# EAGLE board boat1 (EAGLE 6.4)
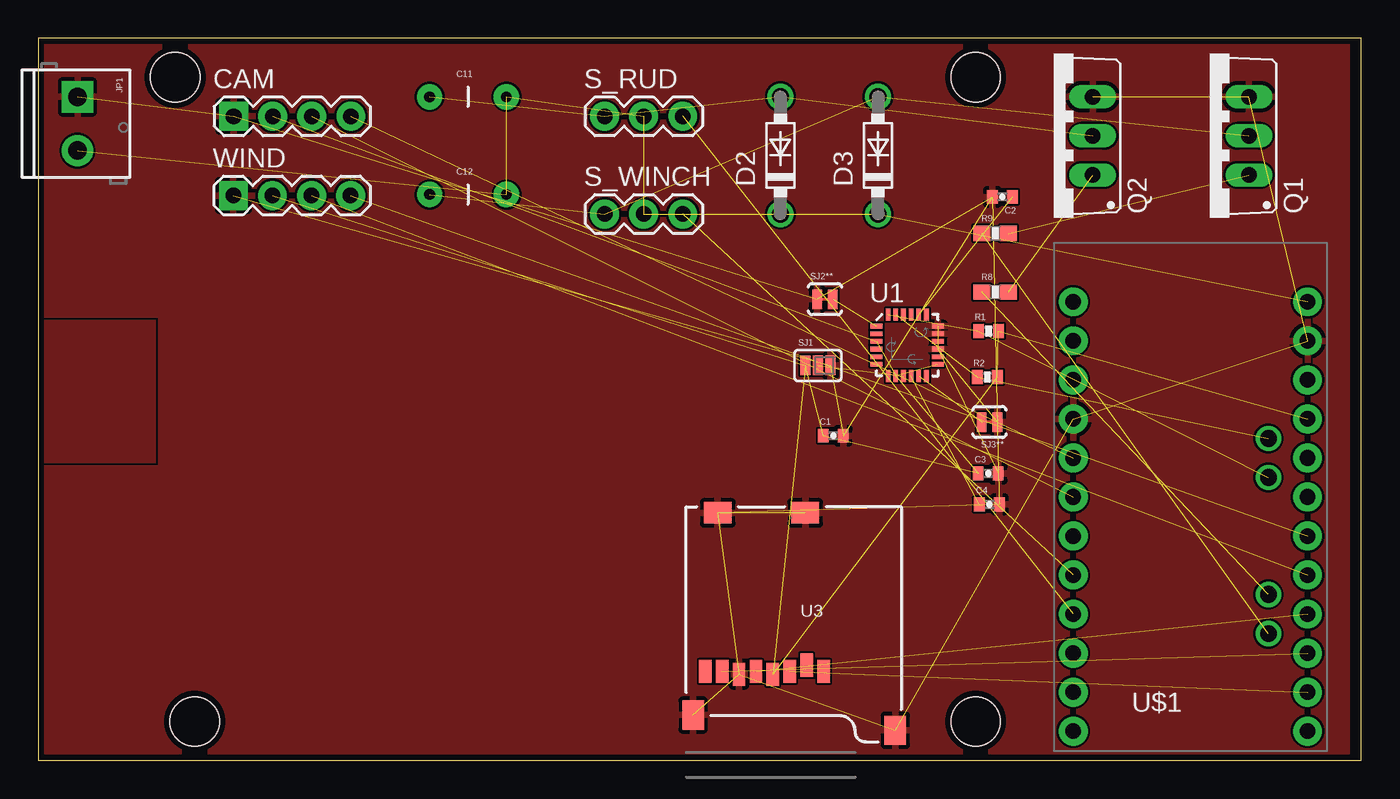
[diagram p0: board, top side]
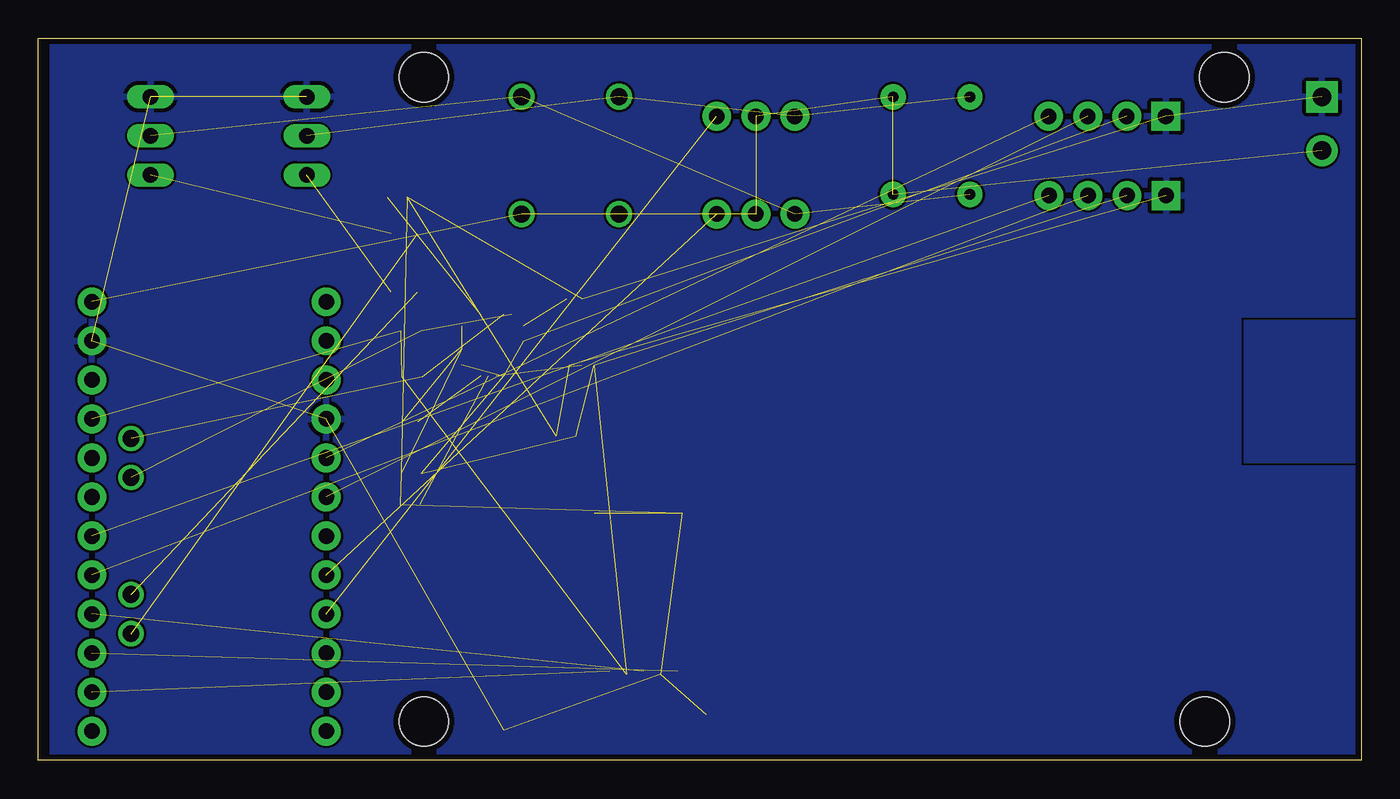
[diagram p1: board, bottom side, seen from below]

Size 86.03 x 46.98 mm. Coordinates in mm from the lower left corner, seen from the top.
Outline: 0,0 86.03,0 86.03,46.98 0,46.98 0,0
Copper layers (1*16): Top 0.0356mm / dielectric 1.5011mm / Bottom 0.0356mm
Design rules "LaenPCBOrder": minimum track width 6mil, minimum drill 13mil, track to track 6mil, track to pad 6mil, pad to pad 6mil, via to via 6mil, smd to smd 6mil, copper to edge 15mil, drill to drill 6mil, minimum pad ring 7mil, minimum via ring 7mil, stop-mask expansion 3mil, vias tented up to drill 0mil, thermal gap 10mil
Holes 3.2 mm at 8.89,44.45 60.96,44.45 60.96,2.54 10.16,2.54

## Footprints (pad centres in the part's own frame; a part is rotated, then mirrored left to right if it is on the bottom)
0402-CAP = smd 0.7 x 0.9: 1 -0.65,0; 2 0.65,0
CAP-PTH-5MM = drill 0.7 pad 1.651: 1 -2.5,0; 2 2.5,0
1X04 = drill 1.016 pad 1.88 square: 1 0,0 | drill 1.016 pad 1.88: 2 2.54,0; 3 5.08,0; 4 7.62,0
DO41-7.6 = drill 1.1 pad 1.7: A 3.81,0; C -3.81,0
SCREWTERMINAL-3.5MM-2 = drill 1.2 pad 2.032 square: 1 0,0 | drill 1.2 pad 2.032: 2 3.5,0
TO220BV = drill 1.016 long: D 0,-2.54; G -2.54,-2.54; S 2.54,-2.54
0402-RES = smd 0.7 x 0.9: 1 -0.65,0; 2 0.65,0
0603-RES = smd 1.1 x 1: 1 -0.85,0; 2 0.85,0
1X03 = drill 1.016 pad 1.88: 1 0,0; 2 2.54,0; 3 5.08,0
SJ_3_PASTE2&3 = smd 0.635 x 1.27: 1 -0.813,0; 2 0,0; 3 0.813,0
SJ_2S-TRACE = smd 0.635 x 1.27: 1 -0.508,0; 2 0.508,0
QFN-24-NP = smd 0.8 x 0.3: 1 -2,1.25; 2 -2,0.75; 3 -2,0.25; 4 -2,-0.25; 5 -2,-0.75; 6 -2,-1.25; 13 2,-1.25; 14 2,-0.75; 15 2,-0.25; 16 2,0.25; 17 2,0.75; 18 2,1.25 | smd 0.3 x 0.8: 7 -1.25,-2; 8 -0.75,-2; 9 -0.25,-2; 10 0.25,-2; 11 0.75,-2; 12 1.25,-2; 19 1.25,2; 20 0.75,2; 21 0.25,2; 22 -0.25,2; 23 -0.75,2; 24 -1.25,2
MICRO-SD-SOCKET-PP = smd 0.8 x 1.5: 1 -8.94,10.7; 2 -7.84,10.3; 3 -6.74,10.7; 4 -5.64,10.9; 5 -4.54,10.7; 6 -3.44,10.9; 7 -2.34,10.7; 8 -1.24,10.7 | smd 1.8 x 1.4: CD1 -2.05,0.4; CD2 -7.75,0.4 | smd 1.4 x 1.9: GND1 -13.6,14.55; GND3 -0.45,13.55
ARDUINO_MINI = drill 1.016 pad 1.88: 1 -7.62,12.7; 2 -7.62,10.16; 3 -7.62,7.62; 4 -7.62,5.08; 5 -7.62,2.54; 6 -7.62,0; 7 -7.62,-2.54; 8 -7.62,-5.08; 9 -7.62,-7.62; 10 -7.62,-10.16; 11 -7.62,-12.7; 12 -7.62,-15.24; 13 7.62,-15.24; 14 7.62,-12.7; 15 7.62,-10.16; 16 7.62,-7.62; 17 7.62,-5.08; 18 7.62,-2.54; 19 7.62,0; 20 7.62,2.54; 21 7.62,5.08; 22 7.62,7.62; 23 7.62,10.16; 24 7.62,12.7 | drill 1.1: 25 5.08,3.81; 26 5.08,1.27; 27 5.08,-6.35; 28 5.08,-8.89

## Placement (x,y rotation side)
C1  0.1uF  [0402-CAP]  51.7,21.13 0 top
C2  2.2nF  [0402-CAP]  62.7,36.67 180 top
C3  10nF  [0402-CAP]  61.78,18.67 0 top
C4  0.1uF  [0402-CAP]  61.86,16.67 0 top
C11  250uF  [CAP-PTH-5MM]  27.94,43.18 0 top
C12  250uF  [CAP-PTH-5MM]  27.94,36.83 0 top
CAM  [1X04]  12.7,41.91 0 top
D2  1N5819-B  [DO41-7.6]  48.26,39.37 90 top
D3  1N5819-B  [DO41-7.6]  54.61,39.37 90 top
JP1  M023.5MM  [SCREWTERMINAL-3.5MM-2]  2.54,43.18 270 top
Q1  60V  [TO220BV]  76.2,40.64 90 top
Q2  60V  [TO220BV]  66.04,40.64 90 top
R1  10k  [0402-RES]  61.8,27.94 0 top
R2  10k  [0402-RES]  61.72,24.94 0 top
R8  100R  [0603-RES]  62.23,30.48 0 top
R9  100R  [0603-RES]  62.23,34.29 0 top
S_RUD  [1X03]  36.83,41.91 0 top
S_WINCH  [1X03]  36.83,35.56 0 top
SJ1  [SJ_3_PASTE2&3]  50.7,25.7 0 top
SJ2**  SOLDERJUMPERTRACE  [SJ_2S-TRACE]  51.16,30.02 0 top
SJ3**  SOLDERJUMPERTRACE  [SJ_2S-TRACE]  61.86,22.02 180 top
U1  MPU-9150  [QFN-24-NP]  56.51,27.02 0 top
U3  USD-SOCKETNEW  [MICRO-SD-SOCKET-PP]  42.13,16.51 180 top
U$1  ARDUINO_MINI  [ARDUINO_MINI]  74.93,17.14 0 top
WIND  [1X04]  12.68,36.76 0 top

## Library data of the parts
C1-C4 R1 R2 SJ1 SJ2** SJ3** = SparkFun-Passives
C11 C12 = SparkFun-Capacitors
CAM JP1 S_RUD S_WINCH WIND = SparkFun-Connectors
D2 D3 = diode
Q1 Q2 = transistor-power
R8 R9 = SparkFun-Resistors
U1 = SparkFun-Sensors
U3 = SparkFun
U$1 = custom_mini

## Nets
3.3V: C1.1 C3.1 CAM.2 R1.2 R2.2 SJ1.1 U1.3 U1.8 U1.13 U3.4 U$1.21 WIND.2
AD0: SJ1.2 U1.9
C_RX: CAM.3 U$1.6
C_TX: CAM.4 U$1.5
CLKIN: SJ2**.2 U1.1
CLKOUT: U1.22
CS: U$1.11
ESC: U1.7
ESD: U1.6
FSYNC: SJ3**.2 U1.11
G_RX: U$1.7
G_TX: U$1.10
GND: C1.2 C2.2 C3.2 C4.2 CAM.1 JP1.1 Q1.S Q2.S SJ1.3 SJ2**.1 SJ3**.1 U1.15 U1.17 U1.18 U3.6 U3.CD1 U3.CD2 U3.GND1 U3.GND3 U$1.4 U$1.23 WIND.1
INT: U1.12
MISO: U3.7 U$1.15
MOSI: U3.3 U$1.14
N$1: C2.1 U1.20
N$2: C4.1 U1.10
N$7: Q2.G R8.2
N$8: C12.1 D3.A Q1.D S_WINCH.1
N$9: C11.1 D2.A Q2.D S_RUD.1
N$10: Q1.G R9.2
N$13: U$1.13
N$163: U3.2
NAV: U$1.12
RUD_EN: R8.1 U$1.27
RUD_V: S_RUD.3 U$1.9
SCK: U3.5 U$1.16
SCL: R2.1 U1.23 U$1.25
SDA: R1.1 U1.24 U$1.26
V_BATT: C11.2 C12.2 D2.C D3.C JP1.2 S_RUD.2 S_WINCH.2 U$1.24
WINCH_EN: R9.1 U$1.28
WN_V: S_WINCH.3 U$1.8
WS_1: U$1.18 WIND.4
WS_2: U$1.17 WIND.3

## Tracks (layer width: path | path; a pad name or v marks a point on that pad's centre or on a via)
3.3V  (11 unrouted)
AD0  (1 unrouted)
C_RX  (1 unrouted)
C_TX  (1 unrouted)
CLKIN  (1 unrouted)
FSYNC  (1 unrouted)
GND  (21 unrouted)
  pour Bottom: 0,46.99 85.09,46.99 85.09,0 0,0 0,19 8,19 8,29 0,29
  pour Top: 0,46.99 85.09,46.99 85.09,0 0,0 0,19 8,19 8,29 0,29
MISO  (1 unrouted)
MOSI  (1 unrouted)
N$1  (1 unrouted)
N$2  (1 unrouted)
N$7  (1 unrouted)
N$8  (3 unrouted)
N$9  (3 unrouted)
N$10  (1 unrouted)
RFGND
  pour Top (rank 2): 0,29 8,29 8,19 0,19
  pour Bottom (rank 2): 0,29 8,29 8,19 0,19
RUD_EN  (1 unrouted)
RUD_V  (1 unrouted)
SCK  (1 unrouted)
SCL  (2 unrouted)
SDA  (2 unrouted)
V_BATT  (7 unrouted)
WINCH_EN  (1 unrouted)
WN_V  (1 unrouted)
WS_1  (1 unrouted)
WS_2  (1 unrouted)